# Altium PCB PCB2.PcbDoc
Units mil, origin at the board's own origin, x right, y up, seen from the top; angles counter-clockwise.
Board outline 6000 x 4000 mil, 2 copper layers (Top Layer, Bottom Layer); 15 components, 19 nets, 63 pads, 9 vias.
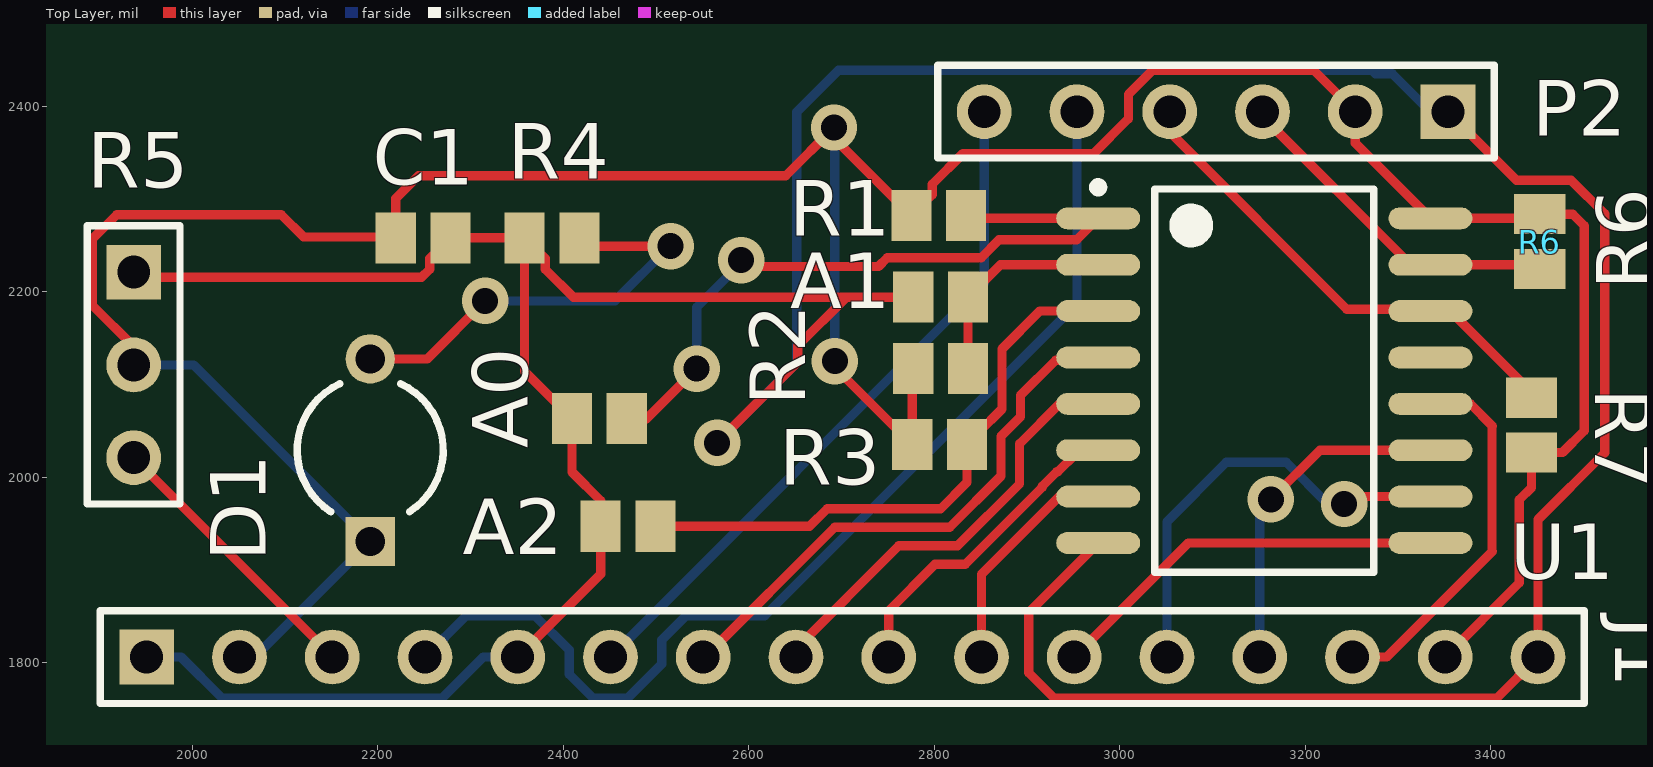
[diagram p0: Top Layer view]
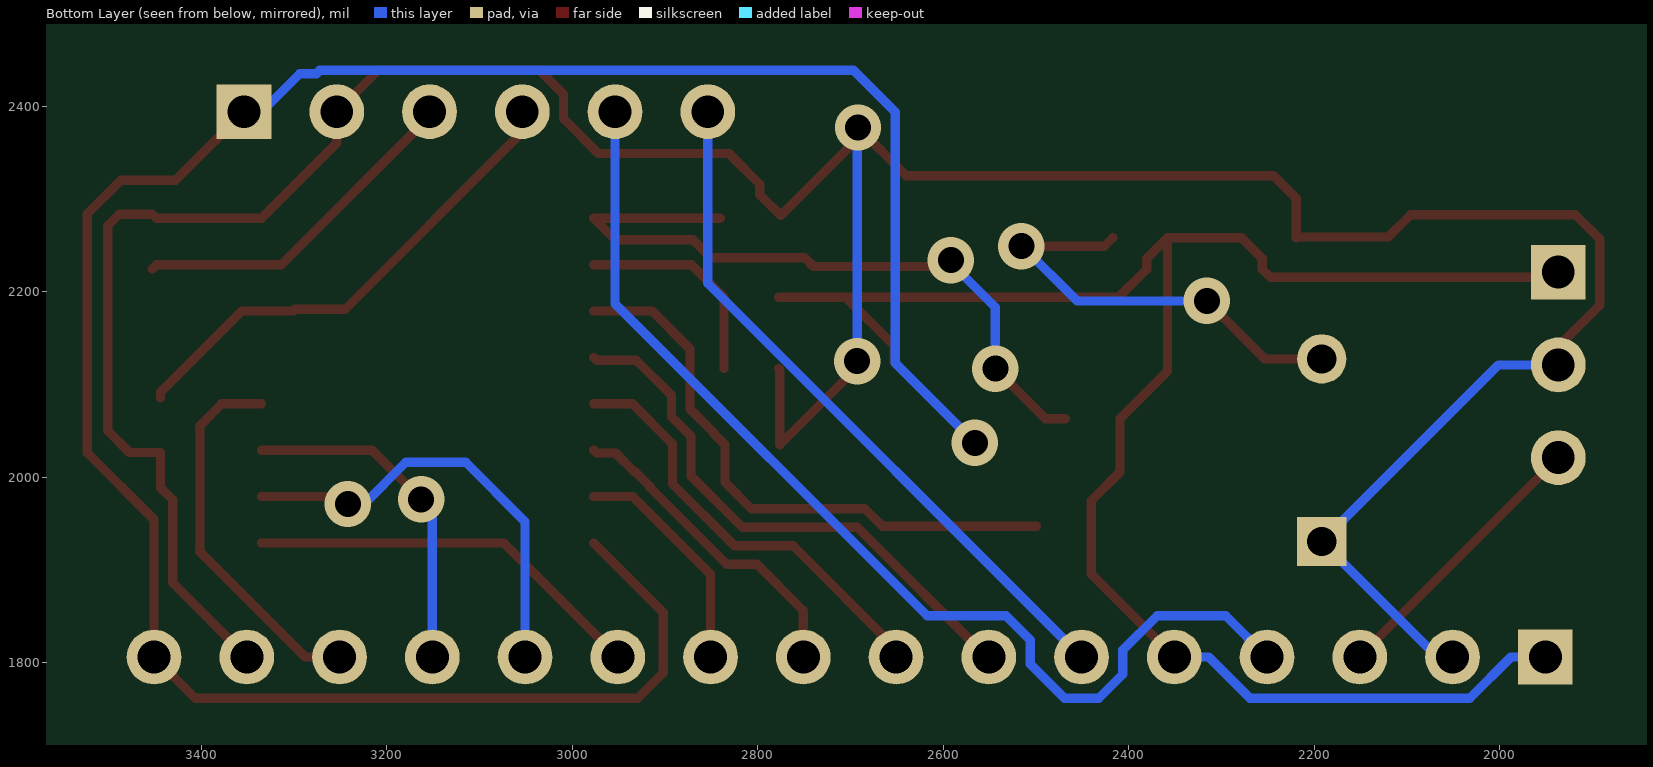
[diagram p1: Bottom Layer view, seen from below]

## Layer stack, top to bottom
Top Layer: signal copper 1.4
Dielectric: dielectric 12.6, FR-4, Dk 4.8
Bottom Layer: signal copper 1.4

## Board outline
1000,1000 7000,1000 7000,5000 1000,5000

## Design rules (kind name [scope] priority, off if disabled: settings)
Clearance [All] p1: gap=10
PolygonConnect [All] p1: connectstyle=Relief reliefconductorwidth=10 reliefentries=4 polygonreliefangle="90 Angle" airgapwidth=10
RoutingVias [All] p1: holewidth=28 width=50 viastyle="Through Hole" minholewidth=28 minwidth=50 maxholewidth=28 maxwidth=50
SilkscreenOverComponentPads [All] p1: minsilkscreentomaskgap=10
SolderMaskExpansion [All] p1: expansion=4
Width [All] p1: maxlimit=10 minlimit=10 preferedwidth=10
27 further rules are at their usual default settings.

## Components (designator, comment, footprint, x,y, rotation, side; value= is the part's Value field where it differs from the comment)
A0 "Res2" C0805 2439,2063 r0 top
A1 "Res2" C0805 2807,2194 r0 top
A2 "Res2" C0805 2470,1947 r0 top
C1 "Cap Semi" C0805 2249,2258 r180 top
D1 "LED0" CAPR5-4X5 2192,2029 r90 top
J1 "LCD1602" HDR1X16 1951,1806 r0 top
P2 "Header 6" HDR1X6 3354,2394 r180 top
R1 "Res2" C0805 2805,2282 r0 top
R2 "Res2" C0805 2807,2117 r0 top
R3 "Res2" C0805 2806,2035 r0 top
R4 "Res2" C0805 2388,2258 r0 top
R5 "RPot" HDR1X3 1937,2221 r270 top
R6 "Res2" C0805 3453,2254 r90 top
R7 "Res2" C0805 3444,2056 r270 top
U1 "PCF8574" PCF8574 3156,2104 r0 top

## Footprints (in the part's own frame and the unit in brackets; to place one, negate y for a bottom-side part, rotate by r counter-clockwise, add the part's x,y. Pads: shape width x height; smd on the part's side, far side on the other; paste and mask are expansions set on the pad)
C0805 [mm] "Chip Capacitor, Body 2.0x1.3mm, IPC High Density"
  rect 1.1x1.4 smd: 1(-0.75,0) 2(0.75,0)
  body extent -1.1,-0.72 1.1,0.72, height 1.4
CAPR5-4X5 [mm] "Capacitor; 2 Leads"
  rect 1.35x1.35 hole 0.8: 1(-2.5,0)
  round 1.35 hole 0.8: 2(2.5,0)
  silkscreen extent -1.69,-2 1.82,2
HDR1X3 [mm] "Connector; Header; 3 Position"
  rect 1.5x1.5 hole 0.9: 1(0,0)
  round 1.5 hole 0.9: 2(2.54,0) 3(5.08,0)
  silkscreen extent -1.27,-1.27 6.35,1.27
HDR1X6 [mm] "Connector; Header; 6 Position"
  rect 1.5x1.5 hole 0.9: 1(0,0)
  round 1.5 hole 0.9: 2(2.54,0) 3(5.08,0) 4(7.62,0) 5(10.16,0) 6(12.7,0)
  silkscreen extent -1.27,-1.27 13.97,1.27
HDR1X16 [mm] "Connector; Header; 16 Position"
  rect 1.5x1.5 hole 0.9: 1(0,0)
  round 1.5 hole 0.9: 2(2.54,0) 3(5.08,0) 4(7.62,0) 5(10.16,0) 6(12.7,0) 7(15.24,0) 8(17.78,0) 9(20.32,0) 10(22.86,0) 11(25.4,0) 12(27.94,0) 13(30.48,0) 14(33.02,0) 15(35.56,0) 16(38.1,0)
  silkscreen extent -1.27,-1.27 39.37,1.27
PCF8574 [mm] "SOIC, 16-Leads, Body 10.5x7.6mm (max), Pitch 1.27mm, IPC Medium Density"
  oval 2.3x0.6 smd: 1(-4.55,4.445) 2(-4.55,3.175) 3(-4.55,1.905) 4(-4.55,0.635) 5(-4.55,-0.635) 6(-4.55,-1.905) 7(-4.55,-3.175) 8(-4.55,-4.445) 9(4.55,-4.445) 10(4.55,-3.175) 11(4.55,-1.905) 12(4.55,-0.635) 13(4.55,0.635) 14(4.55,1.905) 15(4.55,3.175) 16(4.55,4.445)
  silkscreen extent -4.67,-5.25 3,5.42, body extent -3.8,-5.25 3.8,5.25, height 2.65

## Part data
A0 A1 A2 R1 R2 R3 R4 R6 R7: "Resistor"
C1: "Capacitor (Semiconductor SIM Model)"
D1: "Typical INFRARED GaAs LED"
J1: library part Component_2
P2: "Header, 6-Pin"
R5: "Potentiometer"
U1: library part Component_1

## Via types
v1: diameter 50, hole 28, Top Layer to Bottom Layer, 9 vias

## Nets (pads, with @x,y where several pads share a name; then routed paths per layer and width w, separated by ;. In a path a pad name is that pad's centre, name@x,y a point inside that pad or via, vN(x,y) a via of type N, cw(c..) or ccw(c..) an arc to the next point about the centre after c; other vN are vias at no path point)
A0: A0.2 R1.2 U1.1 | length 780.4
  Top Layer w10: A0.2 2490,2063 v1(2544,2117) ; v1(2592,2234) 2599,2227 2740.05,2227 2749.61,2236.56 2850.8,2236.56 2870.05,2255.81 2953.68,2255.81 U1.1 R1.2@2840.53,2279
  Bottom Layer w10: v1(2544,2117) 2544,2183 2592,2231 v1(2592,2234)
A1: A1.2 R2.2 U1.2 | length 231.8
  Top Layer w10: R2.2 A1.2 2871.53,2229 U1.2
A2: A2.2 R3.2 U1.3 | length 635.5
  Top Layer w10: A2.2 2665.72,1947 2684.72,1966 2807,1966 2835.53,1994.53 R3.2 2848,2047.47 2848,2048.28 2873.18,2073.47 2873.18,2138.18 2914,2179 U1.3
CS: J1.6 P2.6 | length 754.9
  Bottom Layer w10: J1.6 2854,2209 P2.6
DB0: J1.7 U1.4 | length 598.3
  Top Layer w10: J1.7 2553,1806 2693,1946 2816.95,1946 2872.18,2001.23 2872.18,2044.18 2893.18,2065.18 2893.18,2088.18 2931,2126 2973.87,2126 U1.4
DB1: J1.8 U1.5 | length 469.4
  Top Layer w10: J1.8 2651,1815 2762,1926 2825.24,1926 2892.18,1992.94 2892.18,2035.9 2935.28,2079 U1.5
DB2: J1.9 U1.6 | length 348.1
  Top Layer w10: J1.9 2751,1856 2801,1906 2833.52,1906 2916.59,1989.07 2916.59,1990.11 2932.3,2005.81 2933.33,2005.81 2953.52,2026 2973.87,2026 U1.6
DB3: J1.10 U1.7 | length 249.8
  Top Layer w10: J1.10 2851,1895.19 2934.81,1979 U1.7
DB4: J1.11 U1.9 | length 435.1
  Top Layer w10: J1.11 3074,1929 U1.9
DB5: J1.12 U1.10 | length 478.6
  Top Layer w10: v1(3242,1971) 3251,1971 3259,1979 U1.10
  Bottom Layer w10: J1.12 3051,1952 3115,2016 3179.57,2016 3224.57,1971 v1(3242,1971)
DB6: J1.13 U1.11 | length 369.1
  Top Layer w10: v1(3163,1976) 3216,2029 U1.11
  Bottom Layer w10: J1.13 3151,1964 v1(3163,1976)
DB7: J1.14 U1.12 | length 410.6
  Top Layer w10: J1.14 3288.03,1806 3402.01,1919.99 3401.44,1920.56 3401.44,2054.34 3402.05,2054.95 3378,2079 U1.12
GND: A0.1 A1.1 A2.1 C1.1 J1.1 J1.5 J1.16 P2.1 R4.1 R5.1 U1.8 | length 4678.4
  Top Layer w10: R5.1 1942.56,2215.44 2247.34,2215.44 2256.13,2224.23 2256.13,2235.6 C1.1 R4.1 ; J1.5 2440.47,1895.47 A2.1 2440.47,1974.53 2409.47,2005.53 A0.1 2358.47,2114 R4.1 ; v1(2566,2037) 2653,2124 2653,2141.57 2705.43,2194 ; A1.1 2705.43,2194 ; U1.8 2902,1854.13 2902,1789 2929.53,1761.47 3406.47,1761.47 J1.16 3451,1954.26 3523,2026.26 3523,2283.95 3486.77,2320.18 3427.82,2320.18 P2.1 ; R4.1 2380.87,2235.6 2380.87,2224.23 2411.1,2194 2705.43,2194
  Bottom Layer w10: J1.1 1988.03,1806 2032.56,1761.47 2269.44,1761.47 2313.97,1806 J1.5 ; v1(2566,2037) 2652,2123 2652,2393.57 2696.96,2438.53 3272.44,2438.53 3275.97,2435 3294,2435 3335,2394 P2.1
NetD1_2: D1.2 R4.2 | length 476.6
  Top Layer w10: D1.2 2253.43,2127.43 v1(2316,2190) ; R4.2 2426.53,2249 v1(2516,2249)
  Bottom Layer w10: v1(2316,2190) 2456,2190 2515,2249 v1(2516,2249)
RS: J1.4 P2.5 | length 1172
  Bottom Layer w10: J1.4 2295.53,1850.53 2369.44,1850.53 2406.47,1813.5 2406.47,1787.56 2432.56,1761.47 2469.44,1761.47 2506.47,1798.5 2506.47,1824.44 2532.56,1850.53 2617.53,1850.53 2954,2187 P2.5
SCL: P2.4 R7.1 U1.14 | length 534.2
  Top Layer w10: P2.4 3054,2372 3245,2181 3299,2181 3301,2179 U1.14 3356.51,2179 3444,2091.51 R7.1
SDA: P2.3 R6.1 U1.15 | length 372.3
  Top Layer w10: P2.3 3154,2388.75 3313.75,2229 U1.15 3448.47,2229 R6.1
VCC: C1.2 D1.1 J1.2 J1.15 P2.2 R1.1 R2.1 R3.1 R5.2 R6.2 R7.2 U1.16 | length 3616.5
  Top Layer w10: R5.2 1937,2140.73 1892.47,2185.26 1892.47,2256.74 1918.73,2283 2096,2283 2120,2259 2218.47,2259 C1.2 2219.47,2300.47 2244,2325 2640,2325 v1(2692,2377) 2692,2365.47 R1.1 2797.87,2304.4 2797.87,2315.77 2831.1,2349 2971.97,2349 3009.47,2386.5 3009.47,2412.44 3035.56,2438.53 3209.47,2438.53 P2.2 3254,2360.13 U1.16 3448.47,2279 R6.2 3488.47,2283.53 3501,2271 3501,2050 3477.47,2026.47 R7.2 3444,1988.54 3431,1975.54 3431,1886 J1.15 ; v1(2693,2125) 2693,2118.47 R3.1 2776.47,2116 R2.1
  Bottom Layer w10: R5.2 2001.57,2121 D1.1 2067.43,1806 J1.2 ; v1(2692,2377) 2693,2376 v1(2693,2125)
VO: J1.3 R5.3 | length 303.6
  Top Layer w10: R5.3 2151,1807 J1.3
pads on no net: U1.13